# Altium PCB DAQ.PcbDoc
Units mm, origin at the board's own origin, x right, y up, seen from the top; angles counter-clockwise.
Board outline 80 x 80 mm, 4 copper layers (L1, L2 (GND), L3 (PWR), L4), stack 0.844 mm thick; 106 components, 121 nets, 571 pads, 8 vias.
Unrouted connection lines stored in the file: 353.
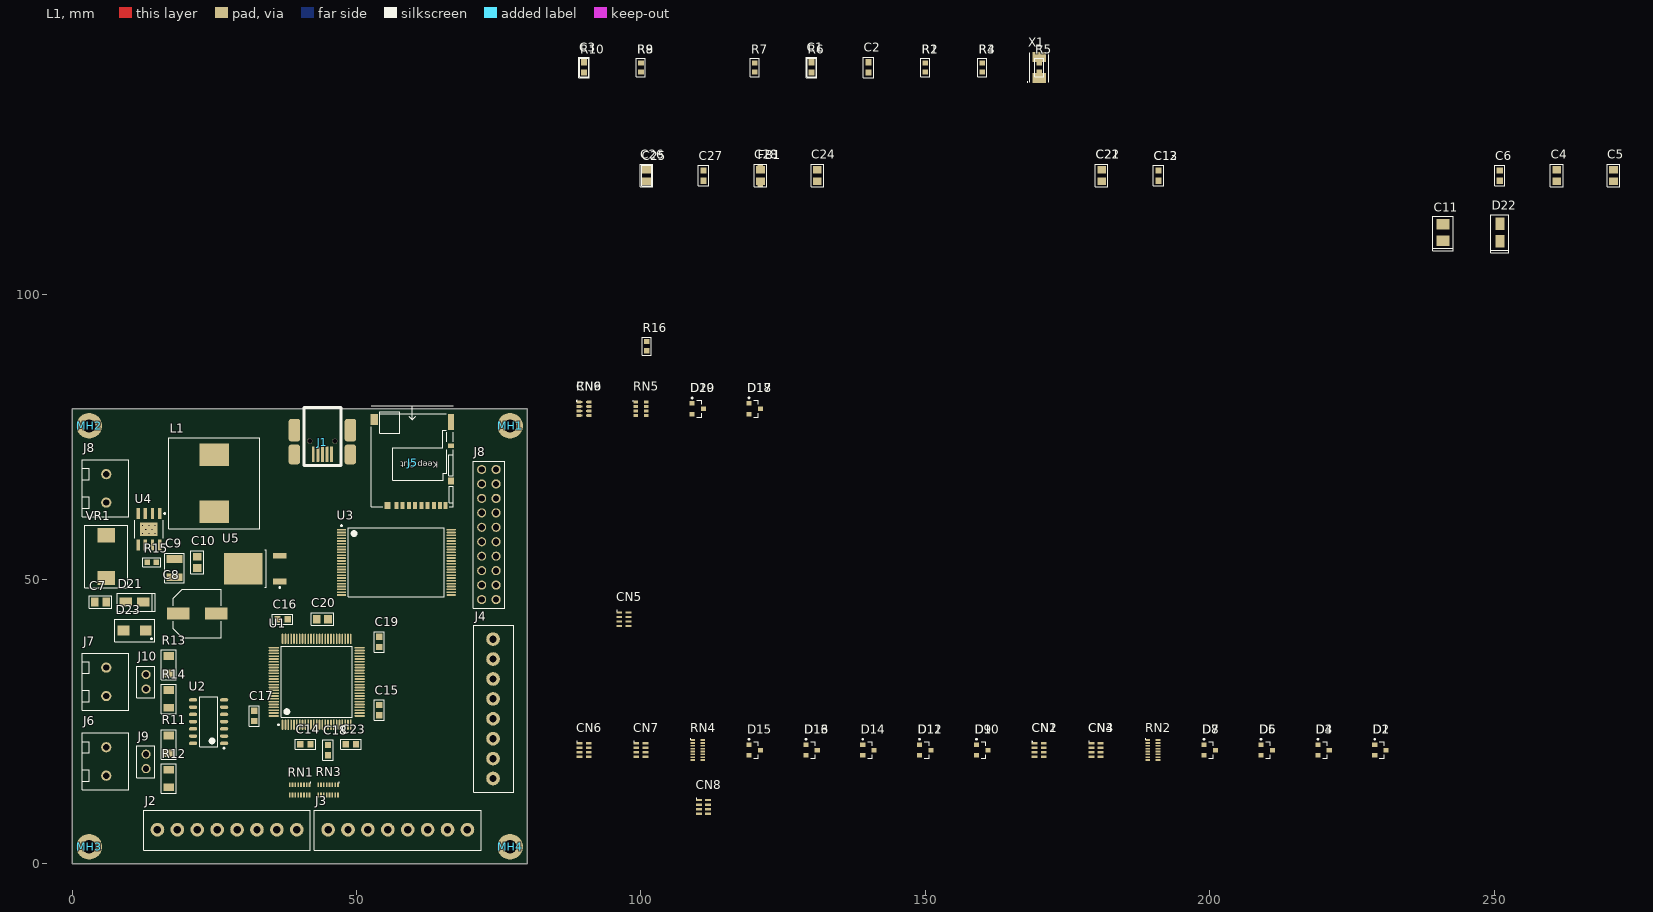
[diagram p0: L1 view]
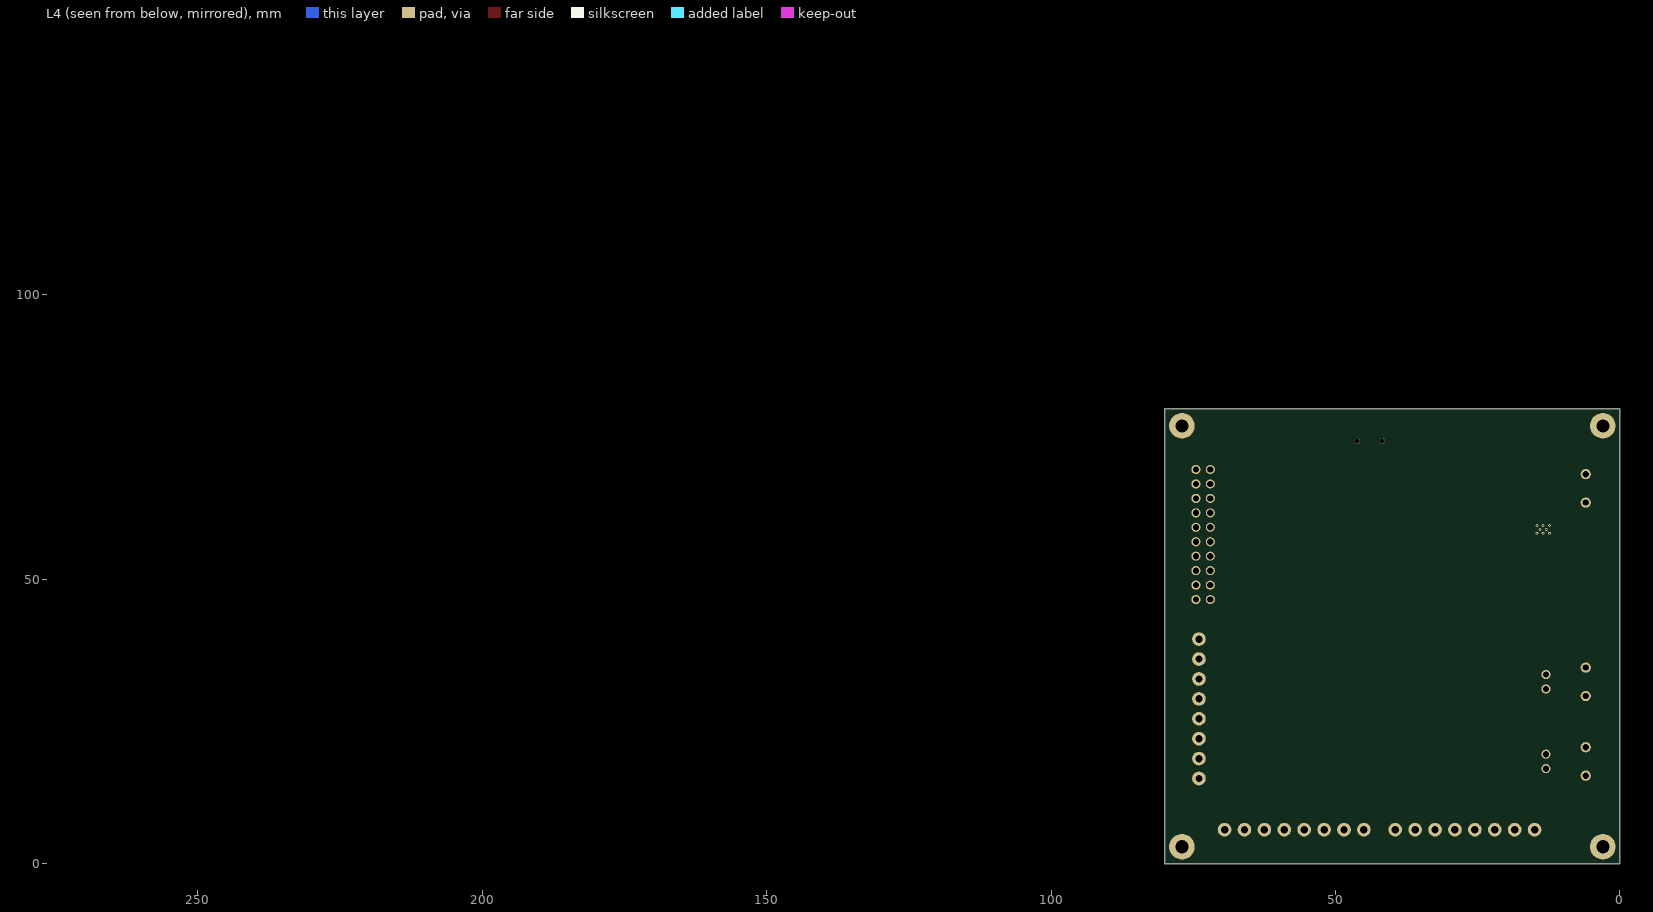
[diagram p1: L4 view, seen from below]
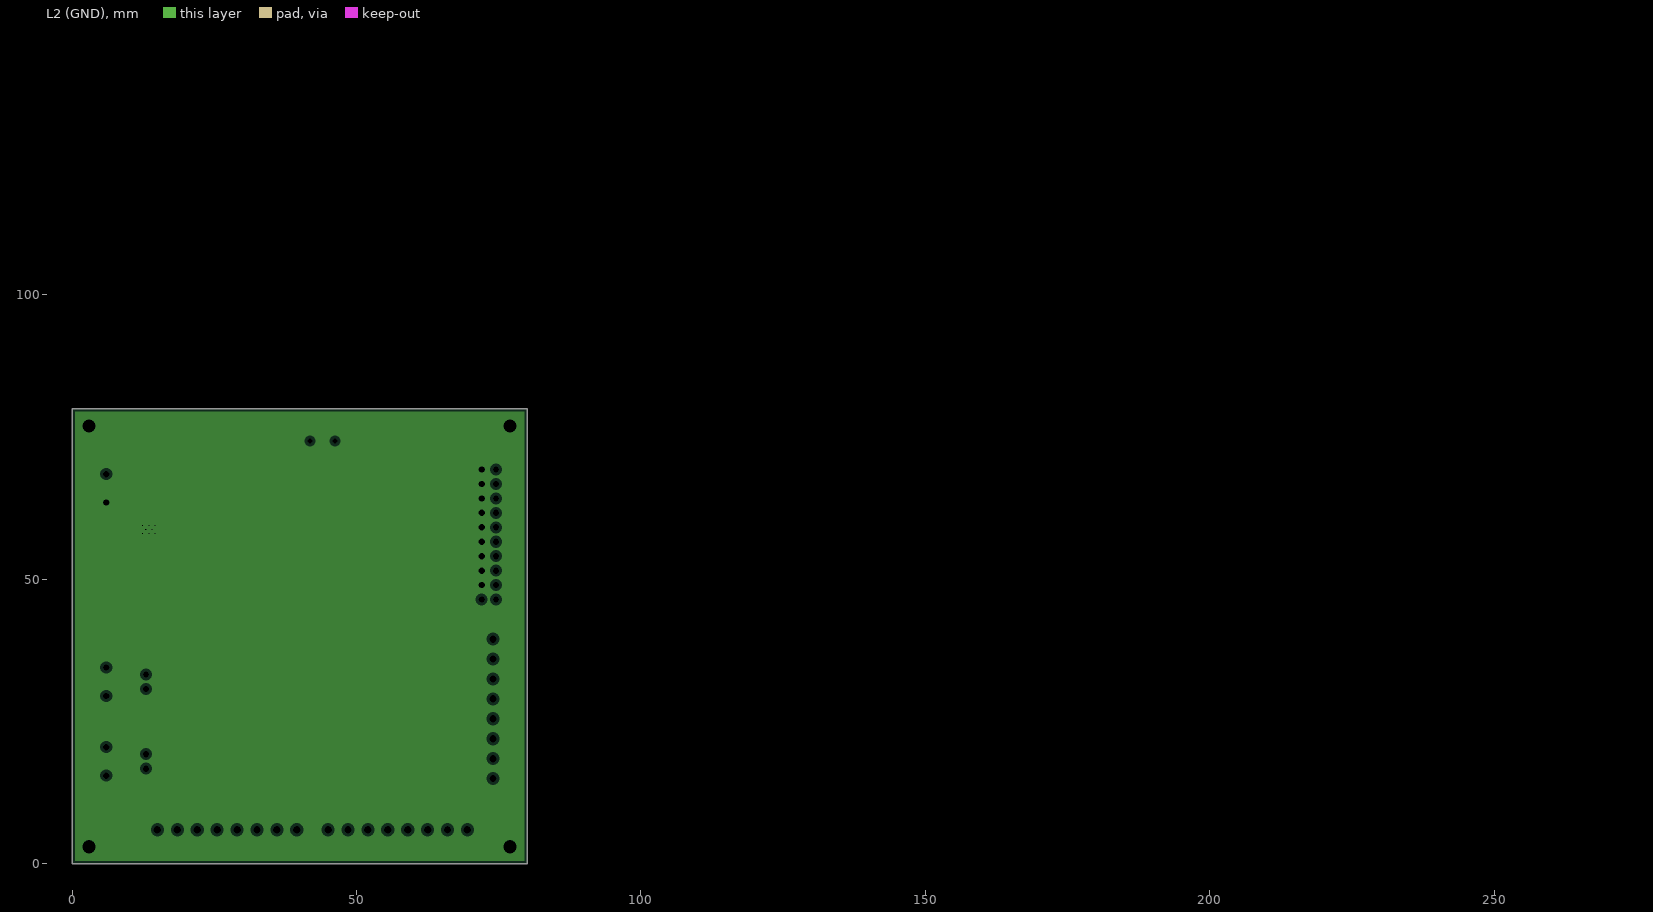
[diagram p2: L2 (GND), clearances drawn from the general rule]
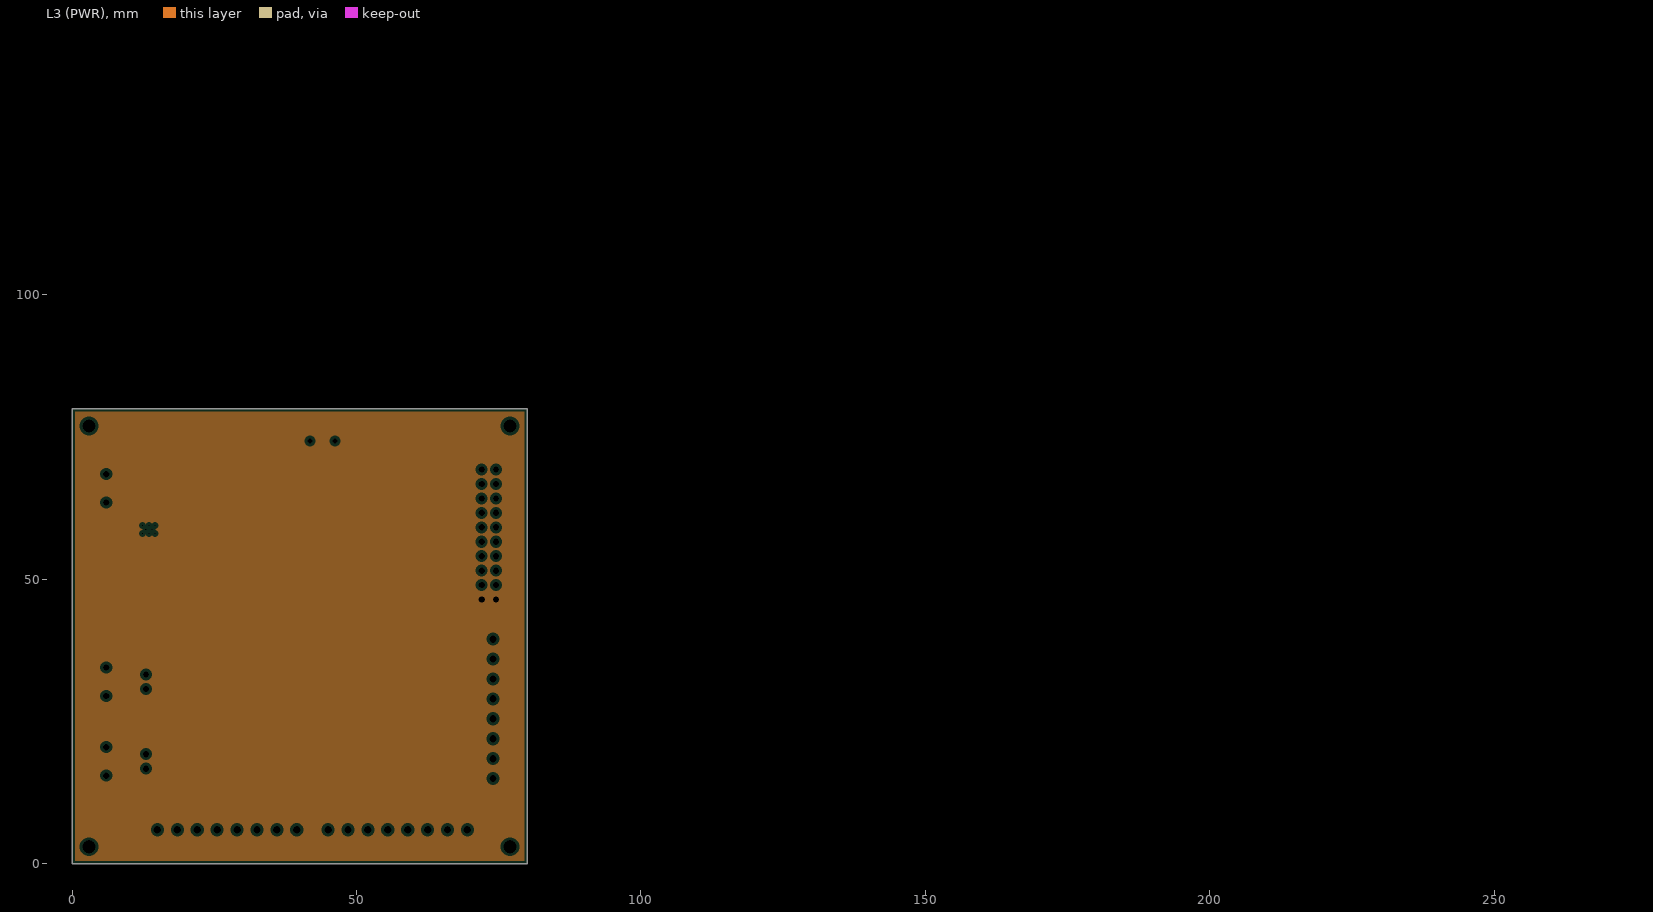
[diagram p3: L3 (PWR), clearances drawn from the general rule]

## Layer stack, top to bottom
Top Solder: solder mask 0.0102, Solder Resist, Dk 3.5
L1: signal copper 0.0356
Dielectric 1: core 0.32, FR-4, Dk 4.8
L2 (GND): plane copper 0.036, net GND
Dielectric 3: prepreg 0.127, Dk 4.2
L3 (PWR): plane copper 0.036, net +3V3
Dielectric 5: core 0.254, Dk 4.2
L4: signal copper 0.0356
Bottom Solder: solder mask 0.0102, Solder Resist, Dk 3.5

## Board outline
0,0 80,0 80,80 0,80 0,0

## Design rules (kind name [scope] priority, off if disabled: settings)
Clearance [All] p1: gap=0.254
DiffPairsRouting [All] p1: maxlimit=0.254 minlimit=0.254 mostfreqgap=0.254 toplayer_minwidth=0.381 toplayer_maxwidth=0.381 toplayer_prefwidth=0.381 bottomlayer_minwidth=0.381 bottomlayer_maxwidth=0.381 bottomlayer_prefwidth=0.381 maxuncoupledlength=12.7
PlaneClearance [All] p1: clearance=0.508
PlaneConnect [All] p1: planeconnectstyle=Relief reliefexpansion=0.508 reliefentries=4 reliefconductorwidth=0.254 reliefairgap=0.254
PolygonConnect [All] p1: connectstyle=Relief reliefconductorwidth=0.254 reliefentries=4 polygonreliefangle="90 Angle" airgapwidth=0.254
RoutingVias [All] p1: holewidth=0.711 width=1.27 viastyle="Through Hole" minholewidth=0.711 minwidth=1.27 maxholewidth=0.711 maxwidth=1.27
SolderMaskExpansion [All] p1: expansion=0.102
Width [All] p1: maxlimit=0.254 minlimit=0.254 preferedwidth=0.254
27 further rules are at their usual default settings.

## Classes and differential pairs
net class NAND.D[0..15]: NAND.D0 NAND.D1 NAND.D2 NAND.D3 NAND.D4 NAND.D5 NAND.D6 NAND.D7 NAND.D8 NAND.D9 NAND.D10 NAND.D11 NAND.D12 NAND.D13 NAND.D14 NAND.D15
net class LED[1..4]: LED1 LED2 LED3 LED4
net class DOUT[1..4]: DOUT1 DOUT2 DOUT3 DOUT4
net class DIN[1..4]: DIN1 DIN2 DIN3 DIN4
net class DIGITAL[1..4]: DIGITAL1 DIGITAL2 DIGITAL3 DIGITAL4
net class ANALOG[1..16]: ANALOG1 ANALOG2 ANALOG3 ANALOG4 ANALOG5 ANALOG6 ANALOG7 ANALOG8 ANALOG9 ANALOG10 ANALOG11 ANALOG12 ANALOG13 ANALOG14 ANALOG15 ANALOG16
net class AIN[1..16]: AIN1 AIN2 AIN3 AIN4 AIN5 AIN6 AIN7 AIN8 AIN9 AIN10 AIN11 AIN12 AIN13 AIN14 AIN15 AIN16
component class Power: C4 C5 C6 C7 C8 C9 C10 C11 C12 C13 C14 C15 C16 C17 C18 C19 C20 C21 C22 C23 C24 C25 C26 C27 C28 D21 D22 D23 FB1 L1 R15 U4 U5 VR1
component class Peripherals: J9 J10 R11 R12 R13 R14 R16 U2 U3
component class Microcontroller: C1 C2 C3 J8 R1 R2 R3 R4 R5 R6 R7 R8 R9 R10 U1 X1
component class Mechanical: MH1 MH2 MH3 MH4
component class Digital: CN9 D17 D18 D19 D20 RN5 RN6
component class Connectors: J1 J2 J3 J4 J5 J6 J7 J8
component class Analog: CN1 CN2 CN3 CN4 CN5 CN6 CN7 CN8 D1 D2 D3 D4 D5 D6 D7 D8 D9 D10 D11 D12 D13 D14 D15 D16 RN1 RN2 RN3 RN4
differential pair CAN2: +CAN2_P -CAN2_N
differential pair CAN1: +CAN1_P -CAN1_N

## Components (designator, comment, footprint, x,y, rotation, side; value= is the part's Value field where it differs from the comment)
C1 "Capacitor 12pF 50V 0603" CAP-0603-M 130,140 r90 top
C2 "Capacitor 12pF 50V 0603" CAP-0603-M 140,140 r90 top
C3 "Capacitor 100nF 25V 0603" CAP-0603-M 90,140 r90 top
C4 "Capacitor 2.2µF 10V 0805" CAP-0805-M 261,121 r90 top
C5 "Capacitor 2.2µF 10V 0805" CAP-0805-M 271,121 r90 top
C6 "Capacitor 10nF 50V 0603" CAP-0603-M 251,121 r90 top
C7 "Capacitor 1nF 50V 0805" CAP-0805-M 5,46 r0 top
C8 "PCR1E221MCL1GS" CAPAE9083X70M 22,44 r0 top
C9 "Capacitor 22µF 25V 1210" CAP-1210-M 18,52 r90 top
C10 "Capacitor 1µF 16V 0805" CAP-0805-M 22,53 r90 top
C11 "8TPC22M" CAP-B1 241,111 r90 top
C12 "Capacitor 100nF 25V 0603" CAP-0603-M 191,121 r90 top
C13 "Capacitor 100nF 25V 0603" CAP-0603-M 191,121 r90 top
C14 "Capacitor 100nF 25V 0603" CAP-0603-M 41,21 r180 top
C15 "Capacitor 100nF 25V 0603" CAP-0603-M 54,27 r270 top
C16 "Capacitor 100nF 25V 0603" CAP-0603-M 37,43 r0 top
C17 "Capacitor 100nF 25V 0603" CAP-0603-M 32,26 r90 top
C18 "Capacitor 100nF 25V 0603" CAP-0603-M 45,20 r270 top
C19 "Capacitor 100nF 25V 0603" CAP-0603-M 54,39 r90 top
C20 "Capacitor 10µF 10V 0805" CAP-0805-M 44,43 r0 top
C21 "Capacitor 2.2µF 10V 0805" CAP-0805-M 181,121 r90 top
C22 "Capacitor 2.2µF 10V 0805" CAP-0805-M 181,121 r90 top
C23 "Capacitor 100nF 25V 0603" CAP-0603-M 49,21 r180 top
C24 "Capacitor 1µF 16V 0805" CAP-0805-M 131,121 r90 top
C25 "Capacitor 100nF 25V 0603" CAP-0603-M 101,121 r90 top
C26 "Capacitor 1µF 16V 0805" CAP-0805-M 101,121 r90 top
C27 "Capacitor 100nF 25V 0603" CAP-0603-M 111,121 r90 top
C28 "Capacitor 1µF 16V 0805" CAP-0805-M 121,121 r90 top
CN1 "CKCA43X7R1H102M100AA" CAF-80P319X159-8N 170,20 r0 top
CN2 "CKCA43X7R1H102M100AA" CAF-80P319X159-8N 170,20 r0 top
CN3 "CKCA43X7R1C104M100AA" CAF-80P319X159-8N 180,20 r0 top
CN4 "CKCA43X7R1C104M100AA" CAF-80P319X159-8N 180,20 r0 top
CN5 "CKCA43X7R1H102M100AA" CAF-80P319X159-8N 97,43 r0 top
CN6 "CKCA43X7R1H102M100AA" CAF-80P319X159-8N 90,20 r0 top
CN7 "CKCA43X7R1C104M100AA" CAF-80P319X159-8N 100,20 r0 top
CN8 "CKCA43X7R1C104M100AA" CAF-80P319X159-8N 111,10 r0 top
CN9 "CKCA43X7R1H102M100AA" CAF-80P319X159-8N 90,80 r0 top
D1 "BAS70-04LT1G" ONSC-SOT-23-3-318-08_V 230,20 r0 top
D2 "BAS70-04LT1G" ONSC-SOT-23-3-318-08_V 230,20 r0 top
D3 "BAS70-04LT1G" ONSC-SOT-23-3-318-08_V 220,20 r0 top
D4 "BAS70-04LT1G" ONSC-SOT-23-3-318-08_V 220,20 r0 top
D5 "BAS70-04LT1G" ONSC-SOT-23-3-318-08_V 210,20 r0 top
D6 "BAS70-04LT1G" ONSC-SOT-23-3-318-08_V 210,20 r0 top
D7 "BAS70-04LT1G" ONSC-SOT-23-3-318-08_V 200,20 r0 top
D8 "BAS70-04LT1G" ONSC-SOT-23-3-318-08_V 200,20 r0 top
D9 "BAS70-04LT1G" ONSC-SOT-23-3-318-08_V 160,20 r0 top
D10 "BAS70-04LT1G" ONSC-SOT-23-3-318-08_V 160,20 r0 top
D11 "BAS70-04LT1G" ONSC-SOT-23-3-318-08_V 150,20 r0 top
D12 "BAS70-04LT1G" ONSC-SOT-23-3-318-08_V 150,20 r0 top
D13 "BAS70-04LT1G" ONSC-SOT-23-3-318-08_V 130,20 r0 top
D14 "BAS70-04LT1G" ONSC-SOT-23-3-318-08_V 140,20 r0 top
D15 "BAS70-04LT1G" ONSC-SOT-23-3-318-08_V 120,20 r0 top
D16 "BAS70-04LT1G" ONSC-SOT-23-3-318-08_V 130,20 r0 top
D17 "BAS70-04LT1G" ONSC-SOT-23-3-318-08_V 120,80 r0 top
D18 "BAS70-04LT1G" ONSC-SOT-23-3-318-08_V 120,80 r0 top
D19 "BAS70-04LT1G" ONSC-SOT-23-3-318-08_V 110,80 r0 top
D20 "BAS70-04LT1G" ONSC-SOT-23-3-318-08_V 110,80 r0 top
D21 "SS26S" "DO-214AC (SMA)" 11,46 r180 top
D22 "SS26S" "DO-214AC (SMA)" 251,111 r90 top
D23 "TPSMA6L24A" SODFL520X110-2N 11,41 r180 top
FB1 "BLM21AG601SN1D" MURA-BLM21A 121,121 r90 top
J1 "067503-1020" MOLX-67503-1020_V 44,72 r270 top
J2 "OSTTE080104" OSTTE0801x4 15,6 r0 top
J3 "OSTTE080104" OSTTE0801x4 45,6 r0 top
J4 "OSTTE080104" OSTTE0801x4 74,15 r90 top
J5 "DM3AT-SF-PEJM5" uSD_DM3AT 57,63 r90 top
J6 "282836-2" 282836-2 6,18 r270 top
J7 "282836-2" 282836-2 6,32 r270 top
J8 "282836-2" 282836-2 6,66 r270 top
J8 "M20-9981046" M20-9981046 72,49 r90 top
J9 "M20-9990246" M20-9990246 13,18 r270 top
J10 "M20-9990246" M20-9990246 13,32 r270 top
L1 "SRR1260A-330M" INDP125125X65N 25,66.9 r90 top
MH1 "2.3mm" MH-2.3mm 77,77 r0 top locked
MH2 "2.3mm" MH-2.3mm 3,77 r0 top locked
MH3 "2.3mm" MH-2.3mm 3,3 r0 top locked
MH4 "2.3mm" MH-2.3mm 77,3 r0 top locked
R1 "Resistor 10K 1/10 W 0603" RES-0603-M 150,140 r90 top
R2 "Resistor 10K 1/10 W 0603" RES-0603-M 150,140 r90 top
R3 "Resistor 10K 1/10 W 0603" RES-0603-M 160,140 r90 top
R4 "Resistor 10K 1/10 W 0603" RES-0603-M 160,140 r90 top
R5 "Resistor 10K 1/10 W 0603" RES-0603-M 170,140 r90 top
R6 "Resistor 10K 1/10 W 0603" RES-0603-M 130,140 r90 top
R7 "Resistor 10K 1/10 W 0603" RES-0603-M 120,140 r90 top
R8 "Resistor 10K 1/10 W 0603" RES-0603-M 100,140 r90 top
R9 "Resistor 10K 1/10 W 0603" RES-0603-M 100,140 r90 top
R10 "Resistor 10K 1/10 W 0603" RES-0603-M 90,140 r90 top
R11 "Resistor 60R4 1/4 W 1206" RES-1206-M 17,21 r90 top
R12 "Resistor 60R4 1/4 W 1206" RES-1206-M 17,15 r270 top
R13 "Resistor 60R4 1/4 W 1206" RES-1206-M 17,35 r90 top
R14 "Resistor 60R4 1/4 W 1206" RES-1206-M 17,29 r270 top
R15 "Resistor 150K 1/10 W 0603" RES-0603-M 14,53 r0 top
R16 "Resistor 10K 1/10 W 0603" RES-0603-M 101,91 r90 top
RN1 "MNR18ERAPJ512" CAF-80P160X100-8N 40,13 r270 top
RN2 "MNR18ERAPJ103" CAF-80P160X100-8N 190,20 r0 top
RN3 "MNR18ERAPJ512" CAF-80P160X100-8N 45,13 r270 top
RN4 "MNR18ERAPJ103" CAF-80P160X100-8N 110,20 r0 top
RN5 "MNR14ERAPJ512" CAC-80P319X159-8N 100,80 r0 top
RN6 "MNR14ERAPJ103" CAC-80P319X159-8N 90,80 r0 top
U1 "STM32F407V" 100-LQFP-14x14-0.5 43,32 r90 top
U2 "TJA1048T" SOP127P600X175-14N 24,25 r180 top
U3 "S34ML04G1" 48-TSOP 57,53 r0 top
U4 "LM22676QMR-5.0" 8-SOIC-EP-4.9x3.9mm 13.5,58.8 r270 top
U5 "LF33CDT" TO-252_M 32.2,51.9 r180 top
VR1 "ERZ-VF2M220" ERZ-VF 6,54 r270 top
X1 "AA-25.000M" TXC-AA 170,140 r90 top

## Footprints (in the part's own frame and the unit in brackets; to place one, negate y for a bottom-side part, rotate by r counter-clockwise, add the part's x,y. Pads: shape width x height; smd on the part's side, far side on the other; paste and mask are expansions set on the pad)
8-SOIC-EP-4.9x3.9mm [mm] "SOIC, 8-Leads, Body 4.90x3.90mm, Pitch 1.27mm, Thermal Pad 3.10x2.41mm, IPC Medium Density"
  rect 1.91x0.61 smd: 1(-2.78,1.905) 2(-2.78,0.635) 3(-2.78,-0.635) 4(-2.78,-1.905) 5(2.78,-1.905) 6(2.78,-0.635) 7(2.78,0.635) 8(2.78,1.905)
  rect 2.41x3.1 smd: EP(0,0)
  silkscreen extent -2.9,-2.5 1.6,2.89, body extent -2,-2.5 2,2.5, height 1.68
48-TSOP [mm] "TSOP, 48-Leads, Body 12.1x18.5mm, Pitch 0.5mm, IPC Medium Density"
  oval 1.65x0.3 smd: 1(-9.65,5.75) 2(-9.65,5.25) 3(-9.65,4.75) 4(-9.65,4.25) 5(-9.65,3.75) 6(-9.65,3.25) 7(-9.65,2.75) 8(-9.65,2.25) 9(-9.65,1.75) 10(-9.65,1.25) 11(-9.65,0.75) 12(-9.65,0.25) 13(-9.65,-0.25) 14(-9.65,-0.75) 15(-9.65,-1.25) 16(-9.65,-1.75) 17(-9.65,-2.25) 18(-9.65,-2.75) 19(-9.65,-3.25) 20(-9.65,-3.75) 21(-9.65,-4.25) 22(-9.65,-4.75) 23(-9.65,-5.25) 24(-9.65,-5.75) 25(9.65,-5.75) 26(9.65,-5.25) 27(9.65,-4.75) 28(9.65,-4.25) 29(9.65,-3.75) 30(9.65,-3.25) 31(9.65,-2.75) 32(9.65,-2.25) 33(9.65,-1.75) 34(9.65,-1.25) 35(9.65,-0.75) 36(9.65,-0.25) 37(9.65,0.25) 38(9.65,0.75) 39(9.65,1.25) 40(9.65,1.75) 41(9.65,2.25) 42(9.65,2.75) 43(9.65,3.25) 44(9.65,3.75) 45(9.65,4.25) 46(9.65,4.75) 47(9.65,5.25) 48(9.65,5.75)
  silkscreen extent -9.77,-6.05 8.42,6.57, body extent -9.25,-6.05 9.25,6.05, height 1.2
100-LQFP-14x14-0.5 [mm] "Thin QFP, 100-Leads, Body 14x14mm, Pitch 0.5mm, IPC Medium Density"
  oval 1.8x0.3 smd: 1(-7.55,6) 2(-7.55,5.5) 3(-7.55,5) 4(-7.55,4.5) 5(-7.55,4) 6(-7.55,3.5) 7(-7.55,3) 8(-7.55,2.5) 9(-7.55,2) 10(-7.55,1.5) 11(-7.55,1) 12(-7.55,0.5) 13(-7.55,0) 14(-7.55,-0.5) 15(-7.55,-1) 16(-7.55,-1.5) 17(-7.55,-2) 18(-7.55,-2.5) 19(-7.55,-3) 20(-7.55,-3.5) 21(-7.55,-4) 22(-7.55,-4.5) 23(-7.55,-5) 24(-7.55,-5.5) 25(-7.55,-6) 51(7.55,-6) 52(7.55,-5.5) 53(7.55,-5) 54(7.55,-4.5) 55(7.55,-4) 56(7.55,-3.5) 57(7.55,-3) 58(7.55,-2.5) 59(7.55,-2) 60(7.55,-1.5) 61(7.55,-1) 62(7.55,-0.5) 63(7.55,0) 64(7.55,0.5) 65(7.55,1) 66(7.55,1.5) 67(7.55,2) 68(7.55,2.5) 69(7.55,3) 70(7.55,3.5) 71(7.55,4) 72(7.55,4.5) 73(7.55,5) 74(7.55,5.5) 75(7.55,6)
  oval 0.3x1.8 smd: 26(-6,-7.55) 27(-5.5,-7.55) 28(-5,-7.55) 29(-4.5,-7.55) 30(-4,-7.55) 31(-3.5,-7.55) 32(-3,-7.55) 33(-2.5,-7.55) 34(-2,-7.55) 35(-1.5,-7.55) 36(-1,-7.55) 37(-0.5,-7.55) 38(0,-7.55) 39(0.5,-7.55) 40(1,-7.55) 41(1.5,-7.55) 42(2,-7.55) 43(2.5,-7.55) 44(3,-7.55) 45(3.5,-7.55) 46(4,-7.55) 47(4.5,-7.55) 48(5,-7.55) 49(5.5,-7.55) 50(6,-7.55) 76(6,7.55) 77(5.5,7.55) 78(5,7.55) 79(4.5,7.55) 80(4,7.55) 81(3.5,7.55) 82(3,7.55) 83(2.5,7.55) 84(2,7.55) 85(1.5,7.55) 86(1,7.55) 87(0.5,7.55) 88(0,7.55) 89(-0.5,7.55) 90(-1,7.55) 91(-1.5,7.55) 92(-2,7.55) 93(-2.5,7.55) 94(-3,7.55) 95(-3.5,7.55) 96(-4,7.55) 97(-4.5,7.55) 98(-5,7.55) 99(-5.5,7.55) 100(-6,7.55)
  silkscreen extent -7.67,-6.25 6.25,6.82, body extent -7,-7 7,7, height 1.6
282836-2 [mm]
  round 1.8 hole 1.1: 1(-2.5,0) 2(2.5,0)
  silkscreen extent -5,-4.2 5,4, body extent -5.6,-4.2 5,4, height 10.2
CAC-80P319X159-8N [mm] "Chip Array, Concave, 8-Leads, Pitch 0.80mm,  Body 3.20x1.60mm,  IPC Medium Density"
  rect 0.8x0.5 smd: 1(-0.9,1.2) 2(-0.9,0.4) 3(-0.9,-0.4) 4(-0.9,-1.2) 5(0.9,-1.2) 6(0.9,-0.4) 7(0.9,0.4) 8(0.9,1.2)
  silkscreen extent -1.41,1.34 -1.31,1.44, body extent -0.87,-1.7 0.87,1.7, height 0.6
CAF-80P160X100-8N [mm]
  rect 0.8x0.3 smd: 1(-0.9,1.75) 2(-0.9,1.25) 3(-0.9,0.75) 4(-0.9,0.25) 5(-0.9,-0.25) 6(-0.9,-0.75) 7(-0.9,-1.25) 8(-0.9,-1.75) 9(0.9,-1.75) 10(0.9,-1.25) 11(0.9,-0.75) 12(0.9,-0.25) 13(0.9,0.25) 14(0.9,0.75) 15(0.9,1.25) 16(0.9,1.75)
  silkscreen extent -1.31,1.89 -1.21,1.99, body extent -0.85,-2.1 0.85,2.1, height 0.5
CAF-80P319X159-8N [mm] "Chip Array, Flat, 8-Leads, Pitch 0.80mm,  Body 3.20x1.60mm,  IPC Medium Density"
  rect 1x0.4 smd: 1(-0.8,1.2) 2(-0.8,0.4) 3(-0.8,-0.4) 4(-0.8,-1.2) 5(0.8,-1.2) 6(0.8,-0.4) 7(0.8,0.4) 8(0.8,1.2)
  silkscreen extent -1.26,1.44 -1.16,1.54, body extent -0.88,-1.7 0.87,1.7, height 1
CAP-0603-M [mm] "Chip Capacitor, Body 1.6x0.8mm, Height 1.0mm, IPC Low Density"
  rect 1.1x1.1 smd: 1(-0.9,0) 2(0.9,0)
  silkscreen extent -1.8,-0.9 1.8,0.9, body extent -0.87,-0.47 0.88,0.48, height 1
CAP-0805-M [mm] "Chip Capacitor, Body 2.0x1.2mm, Height 1.55mm, IPC Low Density"
  rect 1.35x1.55 smd: 1(-1,0) 2(1,0)
  silkscreen extent -2,-1.1 2,1.1, body extent -1.1,-0.72 1.1,0.72, height 1.55
CAP-1210-M [mm] "Chip Capacitor, Body 3.2x2.5mm, Height 1mm, IPC Low Density"
  rect 1.35x2.8 smd: 1(-1.6,0) 2(1.6,0)
  silkscreen extent -2.6,-1.7 2.6,1.7, body extent -1.7,-1.35 1.7,1.35, height 1
CAP-B1 [mm] "Molded Capacitor, 2-Leads, Body 3.50x2.80mm, IPC Medium Density"
  rect 1.85x2.25 smd: 1(-1.425,0) 2(1.425,0)
  silkscreen extent -3.2,-1.8 2.8,1.8, body extent -1.85,-1.5 1.85,1.5, height 1.2
CAPAE9083X70M [mm] "Aluminum Electrolytic Capacitor, Body 8.30x8.30x7.00mm, IPC Low Density"
  rect 3.9x2.15 smd: 1(-3.35,0) 2(3.35,0)
  silkscreen extent -4.25,-4.25 4.25,4.25, body extent -4.25,-4.25 4.25,4.25, height 7
"DO-214AC (SMA)" [mm] "Molded Diode, 2-Leads, Body 4.25x2.67mm, IPC Medium Density"
  rect 2.2x1.55 smd: 1(-1.535,0) 2(1.535,0)
  silkscreen extent -3.6,-1.6 3.1,1.6, body extent -2.25,-1.4 2.25,1.39, height 2.29
ERZ-VF [mm] "ZNR Transient/Surge Absorber, SMD Type"
  rect 2.5x3 smd: 1(-3.75,0) 2(3.75,0)
  silkscreen extent -5.5,-3.75 5.5,3.75, body extent -4.25,-3.2 4.25,3.2, height 3.5
INDP125125X65N [mm] "Precision Wire Wound Inductor, 2-Leads, Body 12.50x12.50mm, IPC Medium Density"
  rect 4x5.15 smd: 1(-5,0) 2(5,0)
  silkscreen extent -8,-8 8,8, body extent -6.4,-6.4 6.4,6.4, height 6.5
M20-9981046 [mm]
  round 1.6 hole 1.1: 1(-2.54,-2.54) 2(-2.54,0) 3(0,-2.54) 4(0,0) 5(2.54,-2.54) 6(2.54,0) 7(5.08,-2.54) 8(5.08,0) 9(7.62,-2.54) 10(7.62,0) 11(10.16,-2.54) 12(10.16,0) 13(12.7,-2.54) 14(12.7,0) 15(15.24,-2.54) 16(15.24,0) 17(17.78,-2.54) 18(17.78,0) 19(20.32,-2.54) 20(20.32,0)
  silkscreen extent -4.04,-4.1 21.8,1.5, body extent -3.74,-3.78 21.62,1.3, height 7.13
M20-9990246 [mm]
  round 1.6 hole 1.1: 1(-1.27,0) 2(1.27,0)
  silkscreen extent -2.77,-1.6 2.83,1.5, body extent -2.51,-1.3 2.57,1.2, height 7.13
MH-2.3mm [mm]
  round 4.5 hole 2.3 mask+0: 1(0,0)
MOLX-67503-1020_V [mm] "Mini USB Connector, SMT, Righer Angle"
  rrect50% 2.8x0.5 smd: 1(0,1.6) 2(0,0.8) 3(0,0) 4(0,-0.8) 5(0,-1.6)
  rrect50% 3.5x2.05 smd: 6(0.025,4.925) 8(0.025,-4.925)
  rrect50% 4x2.05 smd: 7(-4.225,4.925) 9(-4.225,-4.925)
  round 0.9 hole 0.9 unplated: X(-2.325,-2.2) Y(-2.325,2.2)
  silkscreen extent -8.25,-3.25 2,3.25, body extent -8.22,-4.96 0.78,4.94, height 3.95
MURA-BLM21A [mm] "Chip Ferrite Bead, 2-Leads, Body 2x1.25mm, Height 1.05mm"
  rect 1.4x1 smd: 1(-1.3,0) 2(1.3,0)
  body extent -1,-0.63 1,0.63, height 1.05
ONSC-SOT-23-3-318-08_V [mm] "SOT23, 3-Leads, Body 2.92x1.3mm, Pitch 0.95mm"
  rect 0.9x0.8 smd: 1(-1,0.95) 2(-1,-0.95) 3(1,0)
  silkscreen extent -1.12,-1.46 0.65,2.02, body extent -0.65,-1.46 0.65,1.46, height 1.11
OSTTE0801x4 [mm] "Terminal Block 8 Pos"
  round 2.4 hole 1.3: 1(0,0) 2(3.5,0) 3(7,0) 4(10.5,0) 5(14,0) 6(17.5,0) 7(21,0) 8(24.5,0)
  silkscreen extent -2.4,-3.6 26.9,3.4
RES-0603-M [mm] "Chip Resistor, Body 1.6x0.8mm, IPC Medium Density"
  rect 0.9x1 smd: 1(-0.8,0) 2(0.8,0)
  silkscreen extent -1.6,-0.8 1.6,0.8, body extent -0.85,-0.47 0.85,0.47, height 0.6
RES-1206-M [mm] "Chip Resistor, Body 3.2x1.6mm, IPC Low Density"
  rect 1.35x1.9 smd: 1(-1.55,0) 2(1.55,0)
  silkscreen extent -2.6,-1.3 2.6,1.3, body extent -1.67,-0.87 1.67,0.87, height 0.75
SODFL520X110-2N [mm] "SODFL, 2-Leads, Body 2.60x5.20mm, IPC Medium Density"
  rect 2.1x1.75 smd: 1(-1.95,0) 2(1.95,0)
  silkscreen extent -3.5,-2 3.5,2, body extent -2.3,-1.48 2.3,1.48, height 1.1
SOP127P600X175-14N [mm] "SOP, 14-Leads, Body 8.65x3.90mm, Pitch 1.27mm, IPC Medium Density"
  oval 1.45x0.6 smd: 1(-2.725,3.81) 2(-2.725,2.54) 3(-2.725,1.27) 4(-2.725,0) 5(-2.725,-1.27) 6(-2.725,-2.54) 7(-2.725,-3.81) 8(2.725,-3.81) 9(2.725,-2.54) 10(2.725,-1.27) 11(2.725,0) 12(2.725,1.27) 13(2.725,2.54) 14(2.725,3.81)
  silkscreen extent -2.85,-4.4 1.6,4.78, body extent -2,-4.4 2,4.4, height 1.75
TO-252_M [mm] "D-PAK, 4-Leads, Body 6.1x6.5mm, Pitch 2.28mm, Lead Span 9.7mm, IPC Low Density"
  rect 2.4x1 smd: 1(-4.3,2.28) 3(-4.3,-2.28)
  rect 6.8x5.55 smd: 4(2.1,0)
  silkscreen extent -4.43,-3.3 -1.7,3.45, body extent -1.95,-3.3 4.25,3.3, height 2.4
TXC-AA [mm] "DFN, 2-Leads, Body 3.20x5.00mm, Pitch 3.70mm, IPC Medium Density"
  rect 1.7x2.4 smd: 1(-1.85,0) 2(1.85,0)
  silkscreen extent -2.62,-1.68 2.57,2.12, body extent -2.58,-1.68 2.57,1.68, height 1.35
uSD_DM3AT [mm]
  rect 1.2x0.7 smd: 1(0,0) 2(0,-1.1) 3(0,-2.2) 4(0,-3.3) 5(0,-4.4) 6(0,-5.5) 7(0,-6.6)
  rect 1.2x0.7 smd mask+0.07: 8(0,-7.7) 9(0,-8.65)
  rect 1.2x1 smd: 10(4.3,-9.6) 14(0,1.55)
  rect 0.8x1 smd: 11(10.5,-9.6)
  rect 2.8x1 smd: 12(14.65,-9.6)
  rect 1.9x1.3 smd: 13(15.1,3.9)
  silkscreen extent -0.23,-10.03 17.49,4.45, body extent -0.1,-9.7 16.05,4.15, height 1.68

## Part data
C1 C2: library part CC0603JRNPO9BN120
C3 C12 C13 C14 C15 C16 C17 C18 C19 C23 C25 C27: library part CC0603KRX7R8BB104
C4 C5 C21 C22: library part CC0805KKX7R6BB225
C6: library part CC0603KRX7R9BB103
C7: library part CC0805KRX7R9BB102
C8: "SMD Polymer Electrolytic Capacitor"
C9: library part CC1210KKX7R8BB226
C10 C24 C26 C28: library part CC0805KKX7R7BB105
C11: "CAP TANT 22UF 8V 20% B1"
C20: library part CC0805KKX5R6BB106
CN1 CN2 CN5 CN6 CN9: "Capacitor Array - 1nF - 4x - Isolated"
CN3 CN4 CN7 CN8: "Capacitor Array - 100nF - 4x - Isolated"
D1 D2 D3 D4 D5 D6 D7 D8 D9 D10 D11 D12 D13 D14 D15 D16 D17 D18 D19 D20: "Schottky Diode Array"
D21 D22: "SMD Schottky Diode"
D23: "SMD TVS Diode"
FB1: "Chip Ferrite Bead (0805) 600R at 100MHz"
J1: "USB Mini-B"
J2 J3 J4: library part OSTTE0801x4, "Terminal Block 8-pos"
J5: "CONN MICRO SD R/A PUSH-PUSH SMD"
J6 J7 J8: "Terminal Block 2-pos Side Entry 5mm"
J8: "2.54mm Header 2x10-Pin"
J9 J10: library part JUMPER-1, "2.54mm Header Jumper"
L1: "SRR1260 Shield SMD Power Inductor"
MH1 MH2 MH3 MH4: library part MH-2.3mm, "Mounting Hole 2.3mm"
R1 R2 R3 R4 R5 R6 R7 R8 R9 R10 R16: library part RC0603FR-0710KL
R11 R12 R13 R14: library part RC1206FR-0760R4L
R15: library part RC0603FR-07150KL
RN1 RN3: "Resistor Array - 5K1 - x8 - Independent"
RN2 RN4: "Resistor Array - 10K - x8 - Independent"
RN5: "Resistor Array - 5K1 - x4 - Independent"
RN6: "Resistor Array - 10K - x4 - Independent"
U1: "STM32F407 100-LQFP"
U2: "Dual CAN transceiver"
U5: "LDO Fixed 3.3 Automotive"
VR1: "SMD Varistor 22V"
X1: "TXC AA SMD Automotive Crystal"

## Via types
v1: diameter 0.5, hole 0.2, L1 to L4, 8 vias

## Nets (pads, with @x,y where several pads share a name; then routed paths per layer and width w, separated by ;. In a path a pad name is that pad's centre, name@x,y a point inside that pad or via, vN(x,y) a via of type N, cw(c..) or ccw(c..) an arc to the next point about the centre after c; other vN are vias at no path point)
+3V3: C4.2 C5.2 C12.1 C13.1 C14.1 C15.1 C16.1 C17.1 C18.1 C19.1 C20.1 C27.1 C28.2 FB1.1 J5.4 J8.1@74.54,46.46 J8.2@72,46.46 R1.1 R2.1 R3.1 R4.1 R5.1 R9.1 R10.1 R16.2 U1.11 U1.19 U1.28 U1.50 U1.75 U1.100 U2.11 U3.12 U3.37 U5.3
+3V3A: C23.1 C24.2 D1.2 D2.2 D3.2 D4.2 D5.2 D6.2 D7.2 D8.2 D9.2 D10.2 D11.2 D12.2 D13.2 D14.2 D15.2 D16.2 D17.2 D18.2 D19.2 D20.2 FB1.2 U1.21 U1.22
+5V: C11.1 C25.1 C26.2 L1.2 U2.3 U4.4 U5.1
+12V: C8.1 C9.2 C10.2 D21.1 D23.1 R15.2 U4.7
+VBAT: C7.2 D21.2 J8.1@6,68.5 VR1.2
AIN1: CN3.8 D1.3 RN1.8 RN2.8 U1.23
AIN2: CN3.7 D3.3 RN1.7 RN2.7 U1.24
AIN3: CN3.6 D5.3 RN1.6 RN2.6 U1.25
AIN4: CN3.5 D7.3 RN1.5 RN2.5 U1.26
AIN5: CN4.8 D2.3 RN1.4 RN2.4 U1.29
AIN6: CN4.7 D4.3 RN1.3 RN2.3 U1.30
AIN7: CN4.6 D6.3 RN1.2 RN2.2 U1.31
AIN8: CN4.5 D8.3 RN1.1 RN2.1 U1.32
AIN9: CN7.8 D9.3 RN3.8 RN4.8 U1.35
AIN10: CN7.7 D11.3 RN3.7 RN4.7 U1.36
AIN11: CN7.6 D13.3 RN3.6 RN4.6 U1.15
AIN12: CN7.5 D15.3 RN3.5 RN4.5 U1.16
AIN13: CN8.8 D10.3 RN3.4 RN4.4 U1.17
AIN14: CN8.7 D12.3 RN3.3 RN4.3 U1.18
AIN15: CN8.6 D14.3 RN3.2 RN4.2 U1.33
AIN16: CN8.5 D16.3 RN3.1 RN4.1 U1.34
ANALOG1: CN1.8 J2.1 RN1.9
ANALOG2: CN1.7 J2.2 RN1.10
ANALOG3: CN1.6 J2.3 RN1.11
ANALOG4: CN1.5 J2.4 RN1.12
ANALOG5: CN2.8 J2.5 RN1.13
ANALOG6: CN2.7 J2.6 RN1.14
ANALOG7: CN2.6 J2.7 RN1.15
ANALOG8: CN2.5 J2.8 RN1.16
ANALOG9: CN5.8 J3.1 RN3.9
ANALOG10: CN5.7 J3.2 RN3.10
ANALOG11: CN5.6 J3.3 RN3.11
ANALOG12: CN5.5 J3.4 RN3.12
ANALOG13: CN6.8 J3.5 RN3.13
ANALOG14: CN6.7 J3.6 RN3.14
ANALOG15: CN6.6 J3.7 RN3.15
ANALOG16: CN6.5 J3.8 RN3.16
BOOT0: U1.94
BOOT1: U1.37
CAN1.RX: U1.95 U2.4
CAN1.TX: U1.96 U2.1
CAN1_N: J6.1 R11.2 U2.12
CAN1_P: J6.2 R12.2 U2.13
CAN2.RX: U1.91 U2.7
CAN2.TX: U1.92 U2.6
CAN2_N: J7.1 R13.2 U2.9
CAN2_P: J7.2 R14.2 U2.10
DIGITAL1: CN9.8 J4.1 RN5.1
DIGITAL2: CN9.7 J4.2 RN5.2
DIGITAL3: CN9.6 J4.3 RN5.3
DIGITAL4: CN9.5 J4.4 RN5.4
DIN1: D17.3 RN5.8 RN6.8 U1.98
DIN2: D18.3 RN5.7 RN6.7 U1.1
DIN3: D19.3 RN5.6 RN6.6 U1.2
DIN4: D20.3 RN5.5 RN6.5 U1.3
GND: C1.1 C2.1 C3.2 C4.1 C5.1 C7.1 C8.2 C9.1 C10.1 C11.2 C12.2 C13.2 C14.2 C15.2 C16.2 C17.2 C18.2 C19.2 C20.2 C21.1 C22.1 C23.2 C24.1 C25.2 C26.1 C27.2 C28.1 CN1.1 CN1.2 CN1.3 CN1.4 CN2.1 CN2.2 CN2.3 CN2.4 CN3.1 CN3.2 CN3.3 CN3.4 CN4.1 CN4.2 CN4.3 CN4.4 CN5.1 CN5.2 CN5.3 CN5.4 CN6.1 CN6.2 CN6.3 CN6.4 CN7.1 CN7.2 CN7.3 CN7.4 CN8.1 CN8.2 CN8.3 CN8.4 CN9.1 CN9.2 CN9.3 CN9.4 D1.1 D2.1 D3.1 D4.1 D5.1 D6.1 D7.1 D8.1 D9.1 D10.1 D11.1 D12.1 D13.1 D14.1 D15.1 D16.1 D17.1 D18.1 D19.1 D20.1 D22.2 D23.2 J5.6 J5.10 J5.11 J5.12 J5.13 J5.14 J8.2@6,63.5 J8.4 J8.6 J8.8 J8.10 J8.12 J8.14 J8.16 J8.18 J8.20 MH1.1 MH2.1 MH3.1 MH4.1 R6.2 R7.2 R8.2 RN2.9 RN2.10 RN2.11 RN2.12 RN2.13 RN2.14 RN2.15 RN2.16 RN4.9 RN4.10 RN4.11 RN4.12 RN4.13 RN4.14 RN4.15 RN4.16 RN6.1 RN6.2 RN6.3 RN6.4 U1.10 U1.20 U1.27 U1.74 U1.99 U2.2 U2.5 U3.13 U3.25 U3.38 U3.48 U4.6 U4.EP U5.4 VR1.1
  other v1: 12.4,58.1 13.5,58.1 14.6,58.1 12.95,58.8 14.05,58.8 12.4,59.5 13.5,59.5 14.6,59.5
I2C.SCL: U1.47
I2C.SDA: U1.48
JTCK: J8.9 R2.2 U1.76
JTDI: J8.5 R4.2 U1.77
JTDO: J8.13 R1.2 U1.89
JTMS: J8.7 R3.2 U1.72
JTRST: J8.3 R5.2 U1.90
LED1: U1.7
LED2: U1.8
LED3: U1.9
LED4: U1.97
N\A\N\D\_\C\E\: U1.88 U3.9
N\A\N\D\_\O\E\: U1.85 U3.8
N\A\N\D\_\W\A\I\T\: R10.2 U1.87 U3.7
N\A\N\D\_\W\E\: U1.86 U3.18
NAND.ALE: U1.59 U3.17
NAND.CLE: U1.58 U3.16
NAND.D0: U1.61 U3.26
NAND.D1: U1.62 U3.28
NAND.D2: U1.81 U3.30
NAND.D3: U1.82 U3.32
NAND.D4: U1.38 U3.40
NAND.D5: U1.39 U3.42
NAND.D6: U1.40 U3.44
NAND.D7: U1.41 U3.46
NAND.D8: U1.42 U3.27
NAND.D9: U1.43 U3.29
NAND.D10: U1.44 U3.31
NAND.D11: U1.45 U3.33
NAND.D12: U1.46 U3.41
NAND.D13: U1.55 U3.43
NAND.D14: U1.56 U3.45
NAND.D15: U1.57 U3.47
NetC6_1: C6.1 U4.1
NetC6_2: C6.2 D22.1 L1.1 U4.8
NetC21_2: C21.2 U1.73
NetC22_2: C22.2 U1.49
NetJ8_11: J8.11 R6.1
NetJ8_17: J8.17 R7.1
NetJ8_19: J8.19 R8.1
NetJ9_1: J9.1 R11.1
NetJ9_2: J9.2 R12.1
NetJ10_1: J10.1 R13.1
NetJ10_2: J10.2 R14.1
NetR15_1: R15.1 U4.5
NetR16_1: R16.1 U3.19
NRST: C3.1 J8.15 U1.14
OSC_IN: C2.2 U1.12 X1.2
OSC_OUT: C1.2 U1.13 X1.1
RXD: U1.69
SD.CS: J5.2 U1.51
SD.MISO: J5.7 U1.53
SD.MOSI: J5.3 U1.54
SD.SCK: J5.5 U1.52
SD.SW: J5.9 R9.2 U1.93
SERIAL.TX: U1.68
SPI_CS1: U1.63
SPI_CS2: U1.64
SPI_CS3: U1.65
SPI_CS4: U1.66
SPI_MISO: U1.79
SPI_MOSI: U1.80
SPI_SCK: U1.78
USB_D_N: U1.70
USB_D_P: U1.71
pads on no net: J1.1 J1.2 J1.3 J1.4 J1.5 J1.6 J1.7 J1.8 J1.9 J1.X J1.Y J4.5 J4.6 J4.7 J4.8 J5.1 J5.8 U1.4 U1.5 U1.6 U1.60 U1.67 U1.83 U1.84 U2.8 U2.14 U3.1 U3.2 U3.3 U3.4 U3.5 U3.6 U3.10 U3.11 U3.14 U3.15 U3.20 U3.21 U3.22 U3.23 U3.24 U3.34 U3.35 U3.36 U3.39 U4.2 U4.3

## Polygon pours and split planes (outlines as drawn)
GND on L2 (GND) (split plane): 79.49,0.51 0.51,0.51 0.51,79.49 79.49,79.49
+3V3 on L3 (PWR) (split plane): 79.49,0.51 0.51,0.51 0.51,79.49 79.49,79.49

## Text inside footprints (layer, text, board x,y; h text height)
J5: Top Overlay "Keep Out" at 64.4,70.7 h1 r180